# Altium PCB PCB4.PcbDoc
Units mil, origin at the board's own origin, x right, y up, seen from the top; angles counter-clockwise.
Board outline 6000 x 4000 mil, 2 copper layers (Top Layer, Bottom Layer); 14 components, 9 nets, 28 pads, 0 vias.
Unrouted connection lines stored in the file: 20.
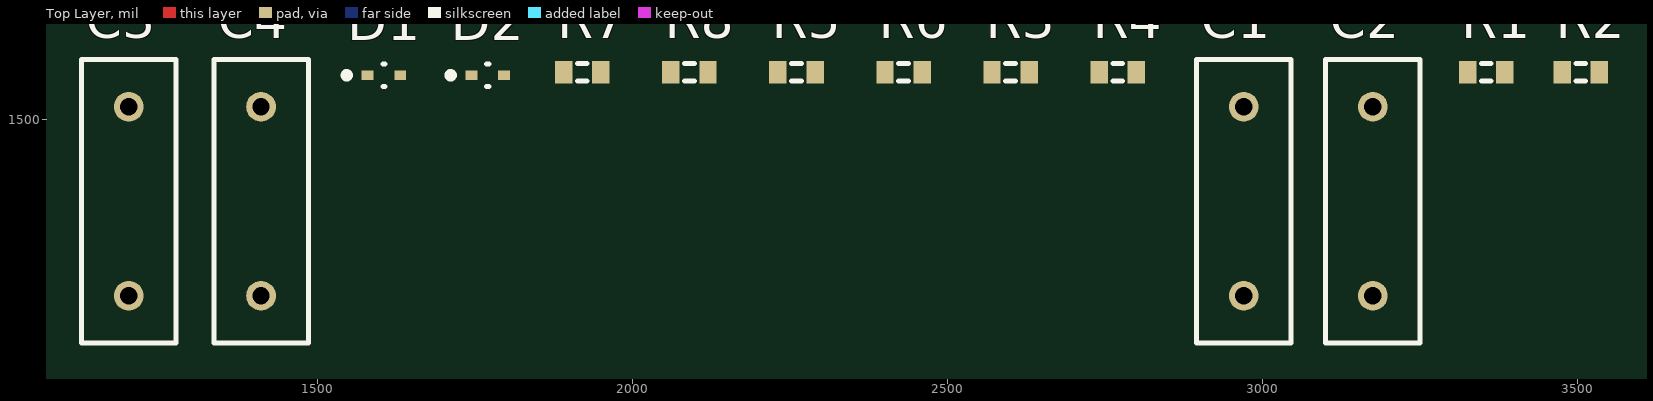
[diagram p0: Top Layer view]
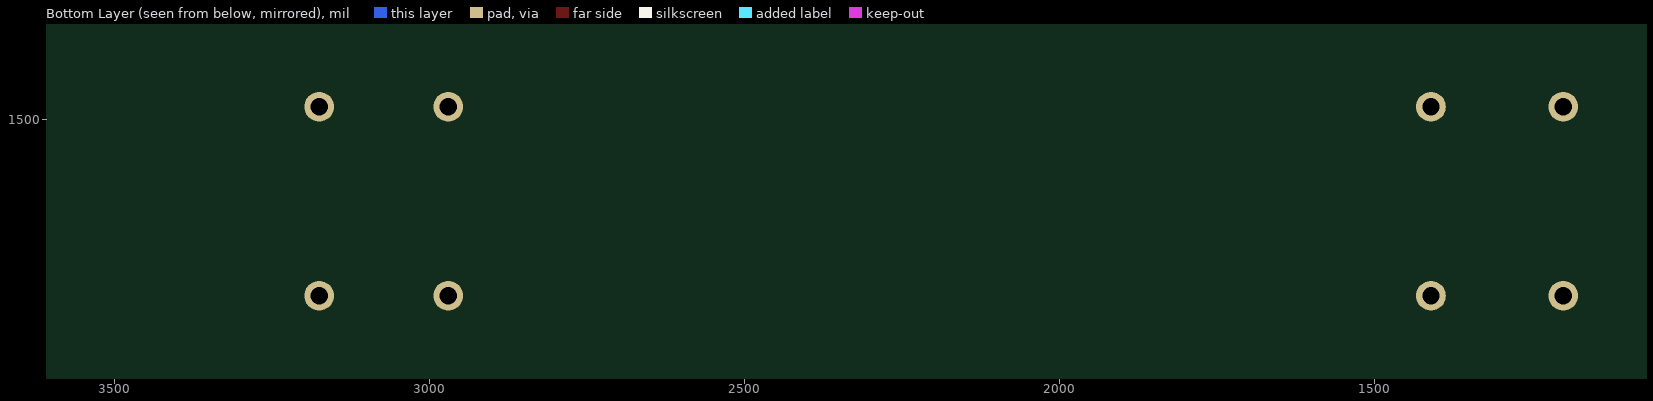
[diagram p1: Bottom Layer view, seen from below]

## Layer stack, top to bottom
Top Solder: solder mask 0.4, Solder Resist, Dk 3.5
Top Layer: signal copper 1.4
Dielectric 1: dielectric 12.6, FR-4, Dk 4.8
Bottom Layer: signal copper 1.4
Bottom Solder: solder mask 0.4, Solder Resist, Dk 3.5

## Board outline
1000,1000 7000,1000 7000,5000 1000,5000

## Design rules (kind name [scope] priority, off if disabled: settings)
Clearance [All] p1: gap=10 ignorepadtopadclearanceinfootprint=FALSE except(0: Arc-Hole Track-Hole SMDPad-Hole THPad-Hole Via-Hole Fill-Hole Poly-Hole Region-Hole Text-Hole)
PolygonConnect [All] p1: connectstyle=Relief reliefconductorwidth=10 reliefentries=4 polygonreliefangle="90 Angle" airgapwidth=10
RoutingVias [All] p1: holewidth=28 width=50 viastyle="Through Hole" minholewidth=28 minwidth=50 maxholewidth=28 maxwidth=50
SolderMaskExpansion [All] p1: expansion=4 istentingtop=FALSE
Width [All] p1: maxlimit=10 minlimit=10 preferedwidth=10
30 further rules are at their usual default settings.

## Components (designator, comment, footprint, x,y, rotation, side; value= is the part's Value field where it differs from the comment)
C1 "Cap" RAD-0.3 2970,1370 r90 top value=200pF
C2 "Cap" RAD-0.3 3175,1370 r90 top value=200pF
C3 "Cap" RAD-0.3 1200,1370 r90 top value=200pF
C4 "Cap" RAD-0.3 1410,1370 r90 top value=200pF
D1 "1N914" FP-502-01-MFG 1605,1570 r0 top value=4pF
D2 "1N914" FP-502-01-MFG 1770,1570 r0 top value=4pF
R1 "Res3" J1-0603 3355,1575 r0 top value=1K
R2 "Res3" J1-0603 3505,1575 r0 top value=1K
R3 "Res3" J1-0603 2600,1575 r0 top value=39K
R4 "Res3" J1-0603 2770,1575 r0 top value=39K
R5 "a" J1-0603 2260,1575 r0 top value=10K
R6 "Res3" J1-0603 2430,1575 r0 top value=10K
R7 "Res3" J1-0603 1920,1575 r0 top value=390K
R8 "Res3" J1-0603 2090,1575 r0 top value=390K

## Footprints (in the part's own frame and the unit in brackets; to place one, negate y for a bottom-side part, rotate by r counter-clockwise, add the part's x,y. Pads: shape width x height; smd on the part's side, far side on the other; paste and mask are expansions set on the pad)
FP-502-01-MFG [mm]
  rect 0.48x0.4 smd paste+0 mask+0: 1(-0.66,0) 2(0.66,0)
  silkscreen extent -1.62,-0.45 0.05,0.45, body extent -1,-0.55 1,0.55, height 0.25
J1-0603 [mm] "Chip Resistor, Body 1.6x0.8mm, IPC High Density"
  rect 0.7x0.9 smd: 1(-0.75,0) 2(0.75,0)
  silkscreen extent -0.2,-0.35 0.2,0.35, body extent -0.85,-0.48 0.85,0.48, height 0.9
RAD-0.3 [mm] "Radial Cap, Thru-Hole; 2 Leads; 0.3 in Pin Spacing"
  round 1.2 hole 0.7: 1(-3.81,0) 2(3.81,0)
  silkscreen extent -5.71,-1.91 5.71,1.91

## Part data
C1 C2 C3 C4: "Capacitor", LatestRevisionDate=17-Jul-2002, LatestRevisionNote="Re-released for DXP Platform.", PackageDescription="Radial Cap, Thru-Hole; 2 Leads; 0.3 in Pin Spacing", PackageReference=RAD-0.3, Published=8-Jun-2000, Publisher="Altium Limited"
D1 D2: library part CMP-07163-000008-1, "DIODE GEN PURP 75V 200MA SOD523F", Capacitance=4pF, Forward Current=300mA, Manufacturer="ON Semiconductor", Manufacturer Part Number=1N914BWT, Max Junction Temp=+150°C, Max Repetitive Reverse Voltage=75V, Package=502-01, Peak Reverse Current=5uA, Reverse Voltage=100V, Temperature="-55°C to +150°C", Temperature Range Low=-55°C, Automotive=No, Category=Diode, ComponentLink2Description=Datasheet, ComponentLink2URL=https://www.onsemi.com/pub/Collateral/1N914BWT-D.pdf, Device Class L1="Discrete Semiconductors", Device Class L2=Diodes, Device Class L3="Rectifier Diodes", Digikey Description="DIODE GEN PURP 75V 200MA SOD523F", Footprint Url=https://www.onsemi.com/pub/Collateral/502-01.PDF, Height=0.7mm, Ipc Land Pattern Name=SODFL16080X60, Lead Free=Yes, Mouser Description="Diodes - General Purpose, Power, Switching SINGLE JUNC. 100V 4.0NS COMP", Octopart=https://octopart.com/1n914bwt-on+semiconductor-84323166, RoHS=TRUE, Temperature Range High=+150°C
R1 R2 R3 R4 R6 R7 R8: "Resistor", LatestRevisionDate=29-May-2009, LatestRevisionNote="IPC-7351 Footprint Added.", PackageDescription="Chip Resistor", PackageReference=J1-0603, Published=8-Jun-2000, Publisher="Altium Limited"
R5: library part Res3, "Resistor", LatestRevisionDate=29-May-2009, LatestRevisionNote="IPC-7351 Footprint Added.", PackageDescription="Chip Resistor", PackageReference=J1-0603, Published=8-Jun-2000, Publisher="Altium Limited"

## Nets (pads, with @x,y where several pads share a name; then routed paths per layer and width w, separated by ;. In a path a pad name is that pad's centre, name@x,y a point inside that pad or via, vN(x,y) a via of type N, cw(c..) or ccw(c..) an arc to the next point about the centre after c; other vN are vias at no path point)
GND: 
Net0V_1: C1.1 R1.1 R3.1 R5.2
Net10V_1: C2.2 R2.1 R4.2 R6.2
NetC1_2: C1.2 D2.2 R3.2 R8.2
NetC2_1: C2.1 D1.2 R4.1 R7.2
NetC3_1: C3.1 C3.2 C4.1 D1.1 R5.1
NetC4_2: C4.2 D2.1 R6.1
VCC: R1.2 R2.2
VEE: R7.1 R8.1